# EAGLE board daisy (EAGLE 5.02)
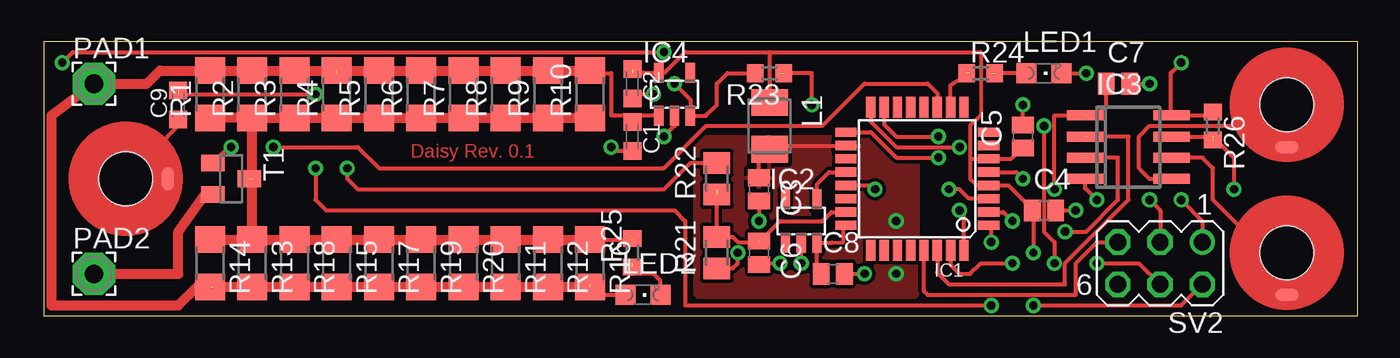
[diagram p0: board, top side]
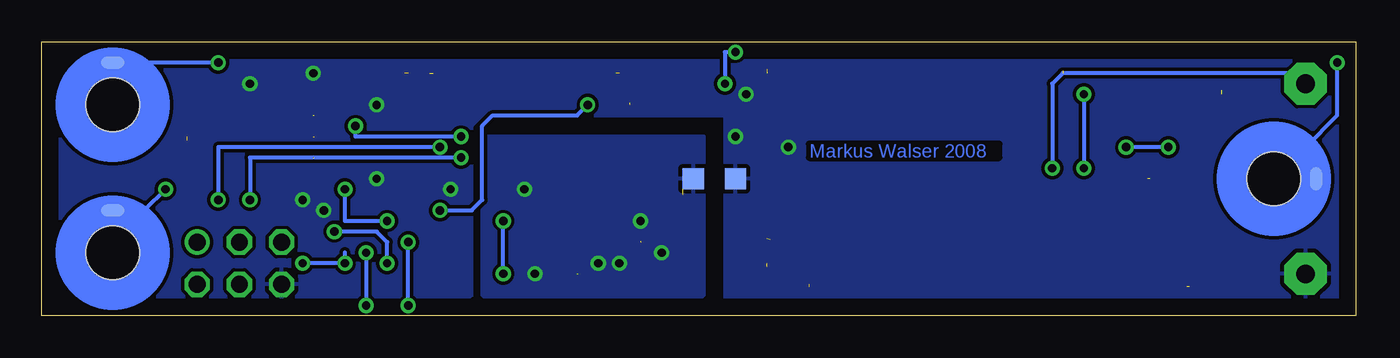
[diagram p1: board, bottom side, seen from below]

Size 79.05 x 16.5 mm. Coordinates in mm from the lower left corner, seen from the top.
Outline: 0,0 79.05,0 79.05,16.5 0,16.5 0,0
Copper layers (1*16): Top 0.035mm / dielectric 1.5mm / Bottom 0.035mm
Design rules "default *": minimum track width 10mil, minimum drill 24mil, track to track 8mil, track to pad 8mil, pad to pad 8mil, via to via 8mil, smd to smd 8mil, copper to edge 40mil, drill to drill 8mil, minimum pad ring 10mil, minimum via ring 8mil, stop-mask expansion 4mil, vias tented up to drill 30mil, thermal gap 10mil

## Footprints (pad centres in the part's own frame; a part is rotated, then mirrored left to right if it is on the bottom)
C0603K = smd 1.05 x 1.08: 1 -0.875,0; 2 0.875,0
C0504 = smd 1 x 1.3: 1 -0.7,0; 2 0.7,0
TQFP32-08 = smd 1.27 x 0.559: 1 -4.293,2.8; 2 -4.293,2; 3 -4.293,1.2; 4 -4.293,0.4; 5 -4.293,-0.4; 6 -4.293,-1.2; 7 -4.293,-2; 8 -4.293,-2.8; 17 4.293,-2.8; 18 4.293,-2; 19 4.293,-1.2; 20 4.293,-0.4; 21 4.293,0.4; 22 4.293,1.2; 23 4.293,2; 24 4.293,2.8 | smd 0.559 x 1.27: 9 -2.8,-4.293; 10 -2,-4.293; 11 -1.2,-4.293; 12 -0.4,-4.293; 13 0.4,-4.293; 14 1.2,-4.293; 15 2,-4.293; 16 2.8,-4.293; 25 2.8,4.293; 26 2,4.293; 27 1.2,4.293; 28 0.4,4.293; 29 -0.4,4.293; 30 -1.2,4.293; 31 -2,4.293; 32 -2.8,4.293
SOT23-5 = smd 0.55 x 1.2: 1 -0.95,-1.3; 2 0,-1.3; 3 0.95,-1.3; 4 0.95,1.3; 5 -0.95,1.3
SO08 = smd 0.6 x 2.2: 1 -1.905,-2.6; 2 -0.635,-2.6; 3 0.635,-2.6; 4 1.905,-2.6; 5 1.905,2.6; 6 0.635,2.6; 7 -0.635,2.6; 8 -1.905,2.6
L3225M = smd 1.6 x 2.2: 1 -1.4,0; 2 1.4,0
CHIPLED_0805 = smd 1.2 x 1.2: A 0,-1.05; C 0,1.05
2,54/1,1 = drill 1.118 pad 2.54 octagon: 1 0,0
R1206 = smd 1.6 x 1.803: 1 -1.422,0; 2 1.422,0
M0805 = smd 1.3 x 1.6: 1 -0.95,0; 2 0.95,0
R0603 = smd 1 x 1.1: 1 -0.85,0; 2 0.85,0
MA03-2 = drill 1.016 round: 1 -2.54,-1.27 | drill 1.016 octagon: 2 -2.54,1.27; 3 0,-1.27; 4 0,1.27; 5 2.54,-1.27; 6 2.54,1.27
SOT23 = smd 1 x 1.4: 1 -0.95,-1.1; 2 0.95,-1.1; 3 0,1.1
PAD_0.1000-2 = smd 1.422 x 0.711 bottom: IN 0,2.54 | smd 1.422 x 0.711: OUT 0,-2.54 | hole 3.2: 0,0
GND-GNDA = smd 1.27 x 1.27: GND -1.27,0; GNDA 1.27,0

## Placement (x,y rotation side)
C1  1uF  [C0603K]  35.39,10.79 270 top
C2  1uF  [C0603K]  35.39,13.96 270 top
C3  100nF  [C0504]  43.02,7.62 270 top
C4  100nF  [C0504]  60.16,6.34 0 top
C5  100nF  [C0504]  58.89,10.79 90 top
C6  100nF  [C0504]  43.02,3.81 270 top
C7  100nF  [C0504]  64.61,13.96 0 top
C8  100nF  [C0504]  47.46,2.54 0 top
C9  1uF  [C0603K]  8.09,12.69 90 top
IC1  MEGA8-AI  [TQFP32-08]  52.54,8.25 180 top
IC2  [SOT23-5]  45.55,5.71 0 top
IC3  [SO08]  65.24,10.15 270 top
IC4  LP3985IM5-3.0  [SOT23-5]  37.93,13.33 0 top
L1  10uH  [L3225M]  43.65,11.42 270 top
LED1  Green  [CHIPLED_0805]  60.16,14.6 270 top
LED2  Red  [CHIPLED_0805]  36.03,1.27 270 top
PAD1  +Bat  [2,54/1,1]  3.01,13.96 0 top
PAD2  -Bat  [2,54/1,1]  3.01,2.54 0 top
R1  150  [R1206]  9.99,13.33 90 top
R2  150  [R1206]  12.54,13.33 90 top
R3  150  [R1206]  15.08,13.33 90 top
R4  150  [R1206]  17.62,13.33 90 top
R5  150  [R1206]  20.16,13.33 90 top
R6  150  [R1206]  22.7,13.33 90 top
R7  150  [R1206]  25.24,13.33 90 top
R8  150  [R1206]  27.78,13.33 90 top
R9  150  [R1206]  30.32,13.33 90 top
R10  150  [R1206]  32.85,13.33 90 top
R11  150  [R1206]  27.78,3.17 270 top
R12  150  [R1206]  30.32,3.17 270 top
R13  150  [R1206]  12.54,3.17 270 top
R14  150  [R1206]  9.99,3.17 270 top
R15  150  [R1206]  17.62,3.17 270 top
R16  150  [R1206]  32.85,3.17 270 top
R17  150  [R1206]  20.16,3.17 270 top
R18  150  [R1206]  15.08,3.17 270 top
R19  150  [R1206]  22.7,3.17 270 top
R20  150  [R1206]  25.24,3.17 270 top
R21  100k  [M0805]  40.47,3.81 90 top
R22  82k  [M0805]  40.47,8.25 90 top
R23  100k  [R0603]  43.65,14.6 180 top
R24  180  [R0603]  56.35,14.6 0 top
R25  180  [R0603]  35.39,3.81 90 top
R26  12k  [R0603]  70.32,11.42 270 top
SV2  [MA03-2]  67.14,3.17 180 top
T1  [SOT23]  11.26,8.25 270 top
X1  PAD_0.1000-2  [PAD_0.1000-2]  4.91,8.25 90 top
X2  PAD_0.1000-2  [PAD_0.1000-2]  74.77,12.69 0 top
X3  PAD_0.1000-2  [PAD_0.1000-2]  74.77,3.81 0 top
~NUDEV~1  GND-GNDA  [GND-GNDA]  38.57,8.25 180 bottom

## Library data of the parts
C1-C9 L1 R21-R26 = rcl
IC1 = atmel
IC2 IC3 T1 X1-X3 = icontroller
IC4 = v-reg-micrel
LED1 LED2 = led
PAD1 PAD2 = wirepad
R1-R20 = resistor
SV2 = con-lstb
~NUDEV~1 = supply-dummy

## Nets
+3V3: C2.1 C4.1 C5.1 IC1.4 IC1.6 IC4.5 L1.1 SV2.2
GND: C1.2 C2.2 C4.2 C5.2 C7.2 IC1.3 IC1.5 IC3.4 IC4.2 LED1.C PAD2.1 SV2.6 T1.2 ~NUDEV~1.GND
GNDA: C3.2 C6.2 C8.2 IC1.21 IC2.2 R21.1 ~NUDEV~1.GNDA
N$1: C3.1 IC1.18 L1.2
N$2: C6.1 IC1.23 R21.2 R22.1
N$3: IC1.20 IC2.4
N$4: IC1.15 SV2.4
N$5: R1.1 R2.1 R3.1 R4.1 R5.1 R6.1 R7.1 R8.1 R9.1 R10.1 R11.1 R12.1 R13.1 R14.1 R15.1 R16.1 R17.1 R18.1 R19.1 R20.1 R25.2 T1.3
N$6: IC1.30 IC3.2
N$7: IC1.31 IC3.3
N$8: IC4.3 R23.2 X1.IN
N$9: IC1.32 R23.1
N$10: IC1.29 SV2.5
N$11: IC1.11 T1.1
N$12: IC1.17 SV2.3
N$13: IC1.16 SV2.1
N$14: LED1.A R24.2
N$15: IC1.10 R24.1
N$16: LED2.C R25.1
N$17: IC3.8 R26.1 X2.IN
N$18: IC3.7 R26.2 X3.IN
N$19: IC3.6 X3.OUT
N$20: IC3.5 X2.OUT
N$21: C7.1 IC1.2 IC3.1
N$22: C9.2 IC1.1
N$23: C8.1 IC1.24 IC2.3
N$24: C9.1 X1.OUT
V+: C1.1 IC4.1 LED2.A PAD1.1 R1.2 R2.2 R3.2 R4.2 R5.2 R6.2 R7.2 R8.2 R9.2 R10.2 R11.2 R12.2 R13.2 R14.2 R15.2 R16.2 R17.2 R18.2 R19.2 R20.2 R22.2

## Tracks (layer width: path | path; a pad name or v marks a point on that pad's centre or on a via)
+3V3  (via drill 0.5)  (2 unrouted)
  Top 0.254: 35.39,14.6 36.06,14.63 IC4.5 37.33,14.63 38.57,15.87 43.65,15.87 | 43.65,15.87 43.65,12.69 | 43.65,15.87 56.35,15.87 56.35,12.06 55.71,11.42 55.71,9.52 | 55.71,9.52 55.71,8.25 56.11,7.85 IC1.4 58.02,7.85 58.82,7.04 C4.1 | 55.71,9.52 55.78,9.45 IC1.6 58.18,9.45 58.32,9.58 C5.1 | C4.1 59.46,6.41 | SV2.2 68.41,0.63 v59.52,0.63 | C4.1 59.52,6.28 v59.52,3.81
  Bottom 0.254: v59.52,3.81 v59.52,0.63
GND  (via drill 0.5)
  Top 0.254: C2.2 35.39,13.33 v36.66,13.33 | IC4.2 37.93,11.42 v37.3,10.79 | C1.2 34.52,9.91 v34.12,10.15 | C5.2 v58.89,12.69 | C7.2 v66.51,13.96 | C4.2 v62.06,6.34 | IC1.3 55.64,7.05 55.08,7.62 v54.45,7.62 | IC3.4 62.64,7.67 v63.33,6.98 | LED1.C v62.7,14.6 | IC1.5 58.49,8.65 v58.89,8.25
  Top 0.61: T1.2 9.68,7.3 8.09,5.08 8.09,2.54 PAD2.1
  pour Bottom: 1.74,16.51 79.21,16.51 79.21,1.27 78.58,0.63 53.81,0.63 53.17,1.27 53.17,11.42 52.54,12.06 37.93,12.06 37.93,0.63 1.1,0.63 0.47,1.27 0.47,15.23
GNDA  (via drill 0.5, 0.5 pad 0.25)
  Top 0.254: R21.1 41.42,2.85 41.74,3.17 v41.74,3.81 | v44.28,3.17 43.02,3.17 C6.2 | C8.2 v49.36,2.54 | IC1.21 49.6,7.85 v50,7.62 | IC2.2 v45.55,3.17 | C3.2 v43.02,5.71
  pour Bottom: 39.84,10.79 52.54,10.79 52.54,1.27 51.91,0.63 39.84,0.63 39.2,1.27 39.2,10.79
N$1  (via drill 0.5)
  Top 0.254: C3.1 43.02,9.52 43.65,10.15 43.74,10.25 IC1.18
  Bottom 0.254: v51.27,2.54 v51.27,5.71
  pour Top: 39.2,1.27 39.2,10.79 52.54,10.79 52.54,1.27 51.91,0.63 39.84,0.63
N$2  (2 unrouted)
  Top 0.254: 40.47,7.62 R21.2 41.42,4.75 41.74,4.44 43.02,4.44 44.28,5.71 46.82,5.71 47.36,6.25 IC1.23
N$3
  Top 0.254: IC1.20 47.22,8.65 46.5,7.93 IC2.4
N$4  (via drill 0.5)
  Top 0.254: IC1.15 50.54,11.52 51.27,10.79 v53.81,10.79 | v60.79,3.17 60.79,4.44 60.16,5.08 v60.16,11.42 | v63.33,3.17 65.88,3.17 SV2.4
  Bottom 0.254: v53.81,10.79 60.16,10.79 v60.16,11.42 | 60.79,3.81 v60.79,3.17 v63.33,3.17
N$5  (2 unrouted)
  Top 0.254: R16.1 35.24,4.59 35.39,4.44
  Top 0.61: R2.1 R1.1 | R2.1 R3.1 | R2.1 12.54,12.06 | R2.1 R3.1 | R3.1 R4.1 17.62,12.06 | R3.1 R5.1 | R5.1 20.16,12.06 | R5.1 R6.1 | R6.1 R7.1 | R6.1 22.7,12.06 | R7.1 R8.1 | R7.1 25.24,12.06 | R8.1 R9.1 | R8.1 27.78,12.06 | R9.1 R10.1 | R9.1 30.32,12.06 | R12.1 R16.1 | R12.1 30.32,4.44 | R11.1 R12.1 | R11.1 27.78,4.44 | R20.1 R11.1 | R20.1 25.24,4.44 | R19.1 R20.1 | R19.1 22.7,4.44 | R17.1 R19.1 | R17.1 20.16,4.44 | R15.1 R17.1 | R15.1 17.62,4.44 | R18.1 R15.1 | R18.1 15.08,4.44 | R13.1 R18.1 | R13.1 12.54,4.44 | R13.1 R14.1 9.99,4.44 | R2.1 12.54,8.25 R13.1
N$6  (1 unrouted)
  Top 0.254: IC1.30 53.74,2.6 54.45,1.9 61.43,1.9 61.43,3.17 65.24,6.98 65.24,10.79 62.7,10.79
N$7  (via drill 0.5)  (1 unrouted)
  Top 0.254: IC1.31 54.54,3.08 55.08,2.54 55.71,2.54 56.35,3.17 v58.25,3.17 | v61.43,5.08 62.7,5.08 64.61,6.98 64.61,9.52 62.7,9.52
  Bottom 0.254: v58.25,3.17 58.25,4.44 58.89,5.08 v61.43,5.08
N$8  (via drill 0.5)
  Top 0.254: v37.93,13.96 38.88,13.01 IC4.3 39.81,12.03 40.47,12.69 40.47,13.96 41.11,14.6 R23.2 | v1.1,15.23 1.74,15.87 v37.3,15.87
  Bottom 0.254: v1.1,15.23 1.1,12.06 3.01,10.15 3.01,8.88 X1.IN | v37.3,15.87 37.93,15.87 v37.93,13.96
N$9  (via drill 0.5)  (1 unrouted)
  Top 0.254: IC1.32 55.34,6.08 v55.08,6.34 | v46.19,12.69 46.19,14.6 44.28,14.6
  Bottom 0.254: v55.08,6.34 53.17,6.34 52.54,6.98 52.54,11.42 51.91,12.06 46.82,12.06 v46.19,12.69
N$10
  Top 0.254: IC1.29 52.94,1.5 53.17,1.27 62.06,1.27 62.06,3.17 63.33,4.44 SV2.5
N$11  (via drill 0.5)
  Top 0.254: T1.1 11.12,10.15 v11.26,10.15 | v13.8,10.15 18.89,10.15 20.16,8.88 37.3,8.88 39.84,11.42 46.82,11.42 49.36,13.96 53.17,13.96 53.74,13.4 IC1.11
  Bottom 0.254: v11.26,10.15 v13.8,10.15
N$12  (via drill 0.5)
  Top 0.254: IC1.17 49.74,11.05 51.27,9.52 v53.81,9.52 | v66.51,6.98 67.14,6.34 SV2.3
  Bottom 0.254: v53.81,9.52 66.51,9.52 v66.51,6.98
N$13  (via drill 0.5)
  Top 0.254: IC1.16 49.74,11.68 51.27,10.15 v55.08,10.15 | SV2.1 69.69,5.71 v68.41,6.98
  Bottom 0.254: v55.08,10.15 68.41,10.15 v68.41,6.98
N$14  (1 unrouted)
  Top 0.254: LED1.A 56.98,14.6
N$15  (1 unrouted)
  Top 0.254: IC1.10 54.54,13.87 55.71,14.6
N$16  (1 unrouted)
  Top 0.254: LED2.C 37.08,2.12 36.66,2.54 35.39,2.54 35.39,3.17
N$17  (via drill 0.5)
  Top 0.254: v68.41,15.23 67.78,14.6 67.78,12.12 IC3.8 70.11,12.06 R26.1
  Bottom 0.254: v68.41,15.23 X2.IN
N$18  (via drill 0.5)  (1 unrouted)
  Top 0.254: v71.59,7.62 71.59,9.52 70.32,10.79 IC3.7
  Bottom 0.254: X3.IN 72.86,6.34 v71.59,7.62
N$19
  Top 0.254: IC3.6 69.69,9.52 70.32,8.88 70.32,6.98 72.22,5.08 72.22,3.17 74.13,1.27 X3.OUT
N$20
  Top 0.254: IC3.5 66.51,8.25 65.88,8.88 65.88,10.79 66.51,11.42 71.59,11.42 72.86,12.69 72.22,12.69 72.22,12.06 74.13,10.15 X2.OUT
N$21  (via drill 0.5)  (1 unrouted)
  Top 0.254: 62.7,12.06 62.63,12.12 | IC1.2 57.71,6.25 v58.25,5.71 | v60.79,7.62 60.79,12.06 62.7,12.06 | C7.1 63.91,12.63 63.33,12.06 62.7,12.06
  Bottom 0.254: v58.25,5.71 60.79,5.71 v60.79,7.62
N$22  (via drill 0.5)  (1 unrouted)
  Top 0.254: 8.09,13.33 v16.35,13.33 | v16.35,8.88 16.35,6.98 16.98,6.34 37.93,6.34 38.57,5.71 38.57,0.63 v56.98,0.63 | IC1.1 56.98,5.3 v56.98,4.44
  Bottom 0.254: v16.35,13.33 v16.35,8.88 | v56.98,0.63 v56.98,4.44
N$23  (1 unrouted)
  Top 0.254: IC1.24 48.09,5.45 48.09,4.44 47.43,4.41 IC2.3 46.5,2.22 46.82,2.54
N$24
  Top 0.254: C9.1 8.09,11.42 6.82,10.15 6.82,8.88 X1.OUT
V+  (via drill 0.5)  (3 unrouted)
  Top 0.254: 32.85,14.6 34.12,14.6 34.12,12.06 35.39,12.06 | IC4.1 36.98,12.38 36.66,12.06 35.39,12.06 | 35.39,12.06 C1.1 | LED2.A 33.49,1.27 32.85,1.9 | R22.2 38.88,9.2 37.3,7.62 18.89,7.62 18.25,8.25 v18.25,8.88
  Top 0.61: R3.2 R2.2 10.15,14.75 9.99,14.6 | R3.2 15.08,14.6 15.71,14.6 | R3.2 R4.2 R5.2 | R5.2 R6.2 | R5.2 20.16,14.6 | R6.2 R7.2 R8.2 | R6.2 22.7,14.6 | R8.2 27.78,14.6 | R8.2 R9.2 | R9.2 30.32,14.6 | R9.2 R10.2 32.85,14.6 | R12.2 R16.2 | R12.2 30.32,1.9 | R11.2 R12.2 | R11.2 27.78,1.9 | R20.2 R11.2 | R20.2 25.24,1.9 | R19.2 R20.2 | R19.2 22.7,1.9 | R17.2 R19.2 | R17.2 20.16,1.9 | R15.2 R17.2 | R15.2 17.62,1.9 | R18.2 R15.2 | R18.2 15.08,1.9 | R13.2 R18.2 | R13.2 12.54,1.9 | R13.2 10.15,1.75 9.99,1.9 | R14.2 9.21,1.75 8.09,0.63 0.47,0.63 0.47,12.06 PAD1.1 6.19,13.96 6.97,14.75 R1.2
  Bottom 0.254: v18.25,8.88 18.25,13.96 17.62,14.6 3.65,14.6 PAD1.1

## Text on the board
Top: Daisy Rev. 0.1
Bottom: Markus Walser 2008